# Altium PCB AmpliHugo.PcbDoc
Units mm, origin at the board's own origin, x right, y up, seen from the top; angles counter-clockwise.
Board outline 22.86 x 24.13 mm, 2 copper layers (Top Layer, Bottom Layer), stack 1.571 mm thick; 10 components, 8 nets, 26 pads, 19 vias.
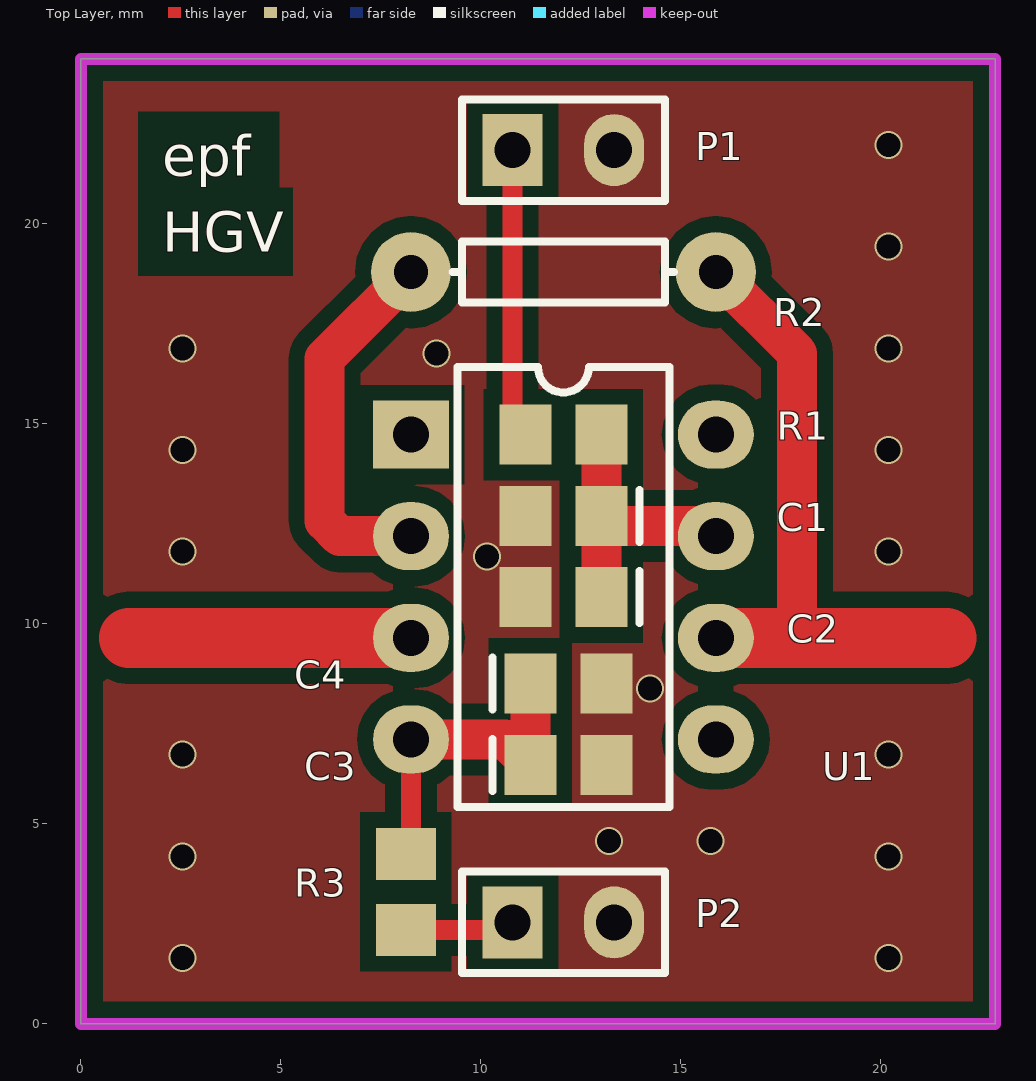
[diagram p0: Top Layer view]
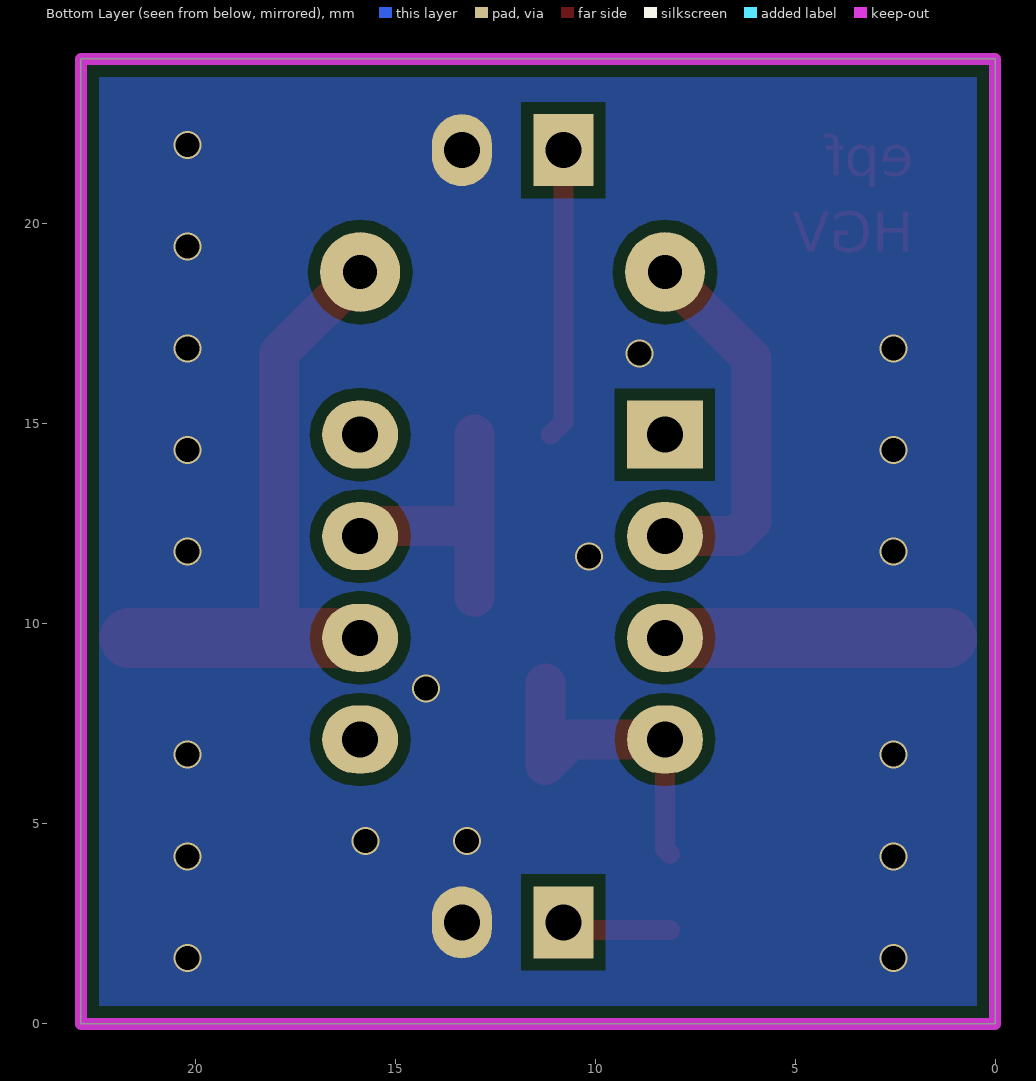
[diagram p1: Bottom Layer view, seen from below]

## Layer stack, top to bottom
Top Layer: signal copper 0.0356
Dielectric: core 1.5, FR-4, Dk 4.8
Bottom Layer: signal copper 0.0356

## Board outline
0,0 0,24.128 22.86,24.128 22.86,0

## Design rules (kind name [scope] priority, off if disabled: settings)
Clearance Clearance_1 [InNamedPolygon('TOPGND')] p1: gap=0.4
Clearance [All] p2: gap=0.3
ComponentClearance [All] p1: gap=0.254 collisioncheckmode=3 verticalgap=0 showdistances=FALSE
PolygonConnect [All] p1: connectstyle=Direct reliefconductorwidth=0.254 reliefentries=4 polygonreliefangle="90 Angle"
RoomDefinition AmpliHugo [InComponentClass('AmpliHugo')] p1: confinementstyle=ConfineIn formatcopy=TRUE lockcomponents=FALSE outline -3.81,-0.254 27.432,-0.254 27.432,24.128 -3.81,24.128
RoutingVias [All] p1: holewidth=0.6 width=1 viastyle="Through Hole" minholewidth=0.711 minwidth=1.27 maxholewidth=0.711 maxwidth=1.27
SilkscreenOverComponentPads [All] p1: minsilkscreentomaskgap=0.254
SolderMaskExpansion [All] p1: expansion=0.102
Width [All] p1: maxlimit=3 minlimit=0.2 preferedwidth=1
26 further rules are at their usual default settings.

## Components (designator, comment, footprint, x,y, rotation, side; value= is the part's Value field where it differs from the comment)
C1 "Cap Pol3" C0805 12.065,12.7 r180 top
C2 "Cap Pol3" C0805 12.065,10.668 r180 top
C3 "Cap Pol3" C0805 12.192,6.477 r0 top
C4 "Cap Pol3" C0805 12.192,8.509 r0 top
P1 "Header 2" HDR1X2 10.795,21.844 r0 top
P2 "Header 2" HDR1X2 10.795,2.54 r0 top
R1 "Res Semi" 2012[0805] 12.065,14.732 r180 top
R2 "Res1" AXIAL-0.3 12.065,18.796 r0 top
R3 "Res Semi" 2012[0805] 8.128,3.302 r270 top
U1 "LM201AJ" 693-02 12.065,10.922 r270 top

## Footprints (in the part's own frame and the unit in brackets; to place one, negate y for a bottom-side part, rotate by r counter-clockwise, add the part's x,y. Pads: shape width x height; smd on the part's side, far side on the other; paste and mask are expansions set on the pad)
693-02 [mm] "DIP; 8 Leads; Row Spacing 7.62 mm; Pitch 2.54 mm"
  rect 1.7x1.9 hole 0.9: 1(-3.81,-3.81)
  oval 1.7x1.9 hole 0.9: 2(-1.27,-3.81) 3(1.27,-3.81) 4(3.81,-3.81) 5(3.81,3.81) 6(1.27,3.81) 7(-1.27,3.81) 8(-3.81,3.81)
  silkscreen extent -5.5,-2.65 5.5,2.65
2012[0805] [mm] "Chip Resistor; Body 2.0 x 1.3 mm (LxW typ)"
  rect 1.3x1.5 smd: 1(-0.95,0) 2(0.95,0)
AXIAL-0.3 [mm] "Resistor; 2 Leads"
  round 2 hole 0.85: 1(-3.81,0) 2(3.81,0)
  silkscreen extent -2.77,-0.76 2.77,0.76
C0805 [mm] "Chip Capacitor; Body 2.0 x 1.2 mm (LxW typ)"
  rect 1.3x1.5 smd: 1(-0.95,0) 2(0.95,0)
  silkscreen extent -1.9,-0.65 -1.9,0.65
HDR1X2 [mm] "Connector; Header; 2 Position"
  rect 1.5x1.8 hole 0.9: 1(0,0)
  oval 1.5x1.8 hole 0.9: 2(2.54,0)
  silkscreen extent -1.27,-1.27 3.81,1.27

## Part data
C1 C2 C3 C4: "Polarized Capacitor (Surface Mount)"
P1 P2: "Header, 2-Pin"
R1 R3: "Semiconductor Resistor"
R2: "Resistor"
U1: "General-Purpose Adjustable Operational Amplifier"

## Via types
v1: diameter 0.7, hole 0.6, Top Layer to Bottom Layer, 19 vias

## Nets (pads, with @x,y where several pads share a name; then routed paths per layer and width w, separated by ;. In a path a pad name is that pad's centre, name@x,y a point inside that pad or via, vN(x,y) a via of type N, cw(c..) or ccw(c..) an arc to the next point about the centre after c; other vN are vias at no path point)
GND: C1.2 C2.2 C3.2 C4.2 P1.2 P2.2
  other v1: 2.54,1.651 20.193,1.651 2.54,4.191 20.193,4.191 13.208,4.572 15.748,4.572 2.54,6.731 20.193,6.731 14.224,8.382 10.16,11.684 2.54,11.811 20.193,11.811 2.54,14.351 20.193,14.351 8.89,16.764 2.54,16.891 20.193,16.891 20.193,19.431 20.193,21.971
IN: U1.3 | length 7.1
  Top Layer w1.5: 1.2,9.652 U1.3
NetP1_1: P1.1 R1.2 | length 7.2
  Top Layer w0.5: P1.1 10.795,15.052 R1.2
NetP2_1: P2.1 R3.2 | length 2.7
  Top Layer w0.5: R3.2 10.607,2.352 P2.1
NetR2_1: R2.1 U1.2 | length 9.4
  Top Layer w1: U1.2 6.477,12.192 6.096,12.573 6.096,16.637 R2.1
OUT: R2.2 U1.6 | length 15.7
  Top Layer w1: R2.2 17.907,16.764 17.907,9.652
  Top Layer w1.5: U1.6 17.907,9.652 21.639,9.652
VCC: C1.1 C2.1 R1.1 U1.7 | length 7
  Top Layer w1: C2.1 C1.1 ; R1.1 C1.1 ; U1.7@15.875,12.446 13.269,12.446 C1.1
VSS: C3.1 C4.1 R3.1 U1.4 | length 8.4
  Top Layer w0.5: R3.1 8.255,4.379 U1.4
  Top Layer w1: U1.4@8.128,6.985 U1.4 10.607,7.112 C3.1 C4.1
pads on no net: U1.1 U1.5 U1.8

## Polygon pours and split planes (outlines as drawn)
GND on Bottom Layer "BottomGND" (solid, remove dead copper, pour order 1000): 0,0 0,24.128 22.86,24.128 22.86,0
GND on Top Layer "TOPGND" (solid, remove dead copper, pour order 1001): 0,0 0,24.128 22.86,24.128 22.86,0

## Keep-outs
Keep-Out Layer:
  the board outline again, w0.3

## Other copper
Top Layer:
  text "epf" at 2.032,21.209 h1
  text "HGV" at 2.032,19.304 h1

## Silkscreen, mask and mechanical layers (free items; w line width, h text height)
Top Overlay:
  text "epf" at 2.032,21.209 h1
  text "HGV" at 2.032,19.304 h1

## Dimensions
0,0 to 0,24.128 on Mechanical 1
0,0 to 22.86,0 on Mechanical 1